# EAGLE board Sunsensors_v1.0_pan (EAGLE 7.1.0)
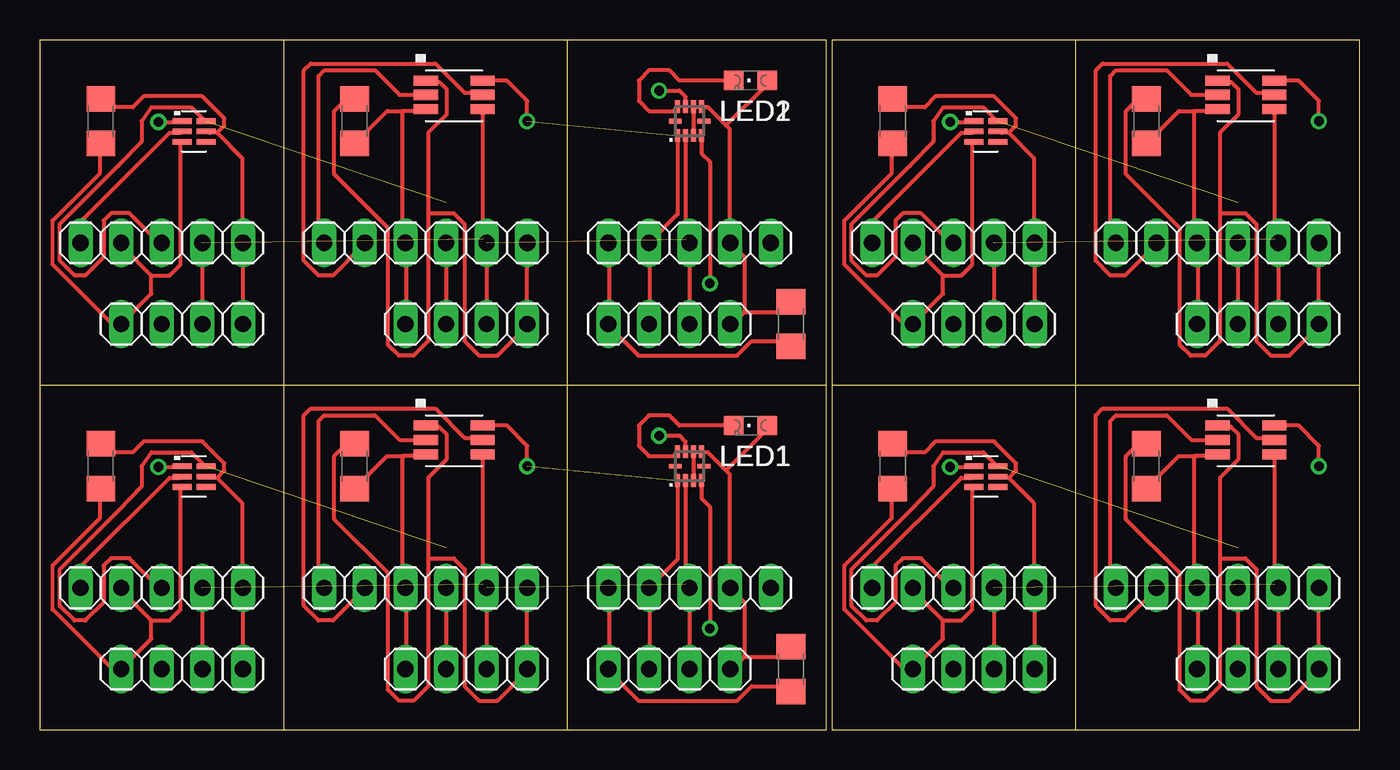
[diagram p0: board, top side]
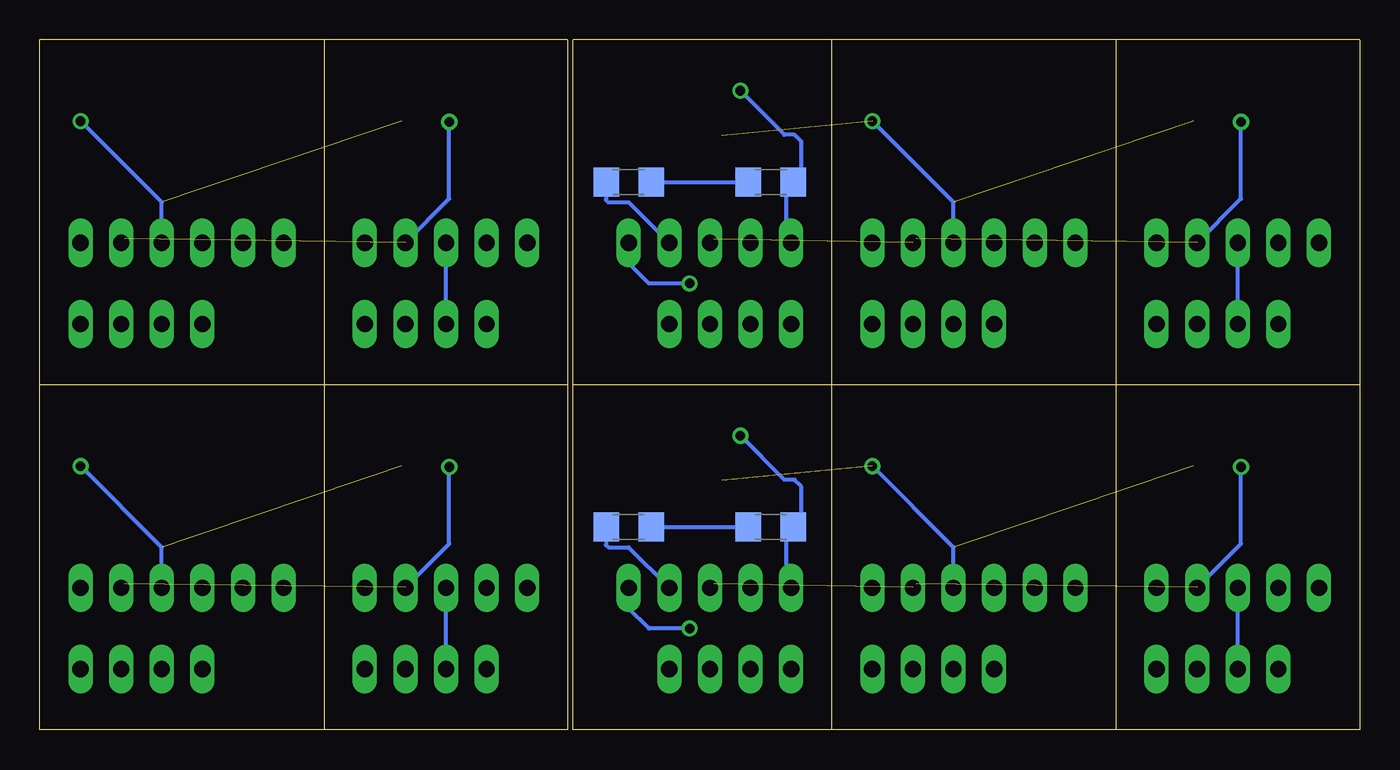
[diagram p1: board, bottom side, seen from below]

Size 82.55 x 43.18 mm. Coordinates in mm from the lower left corner, seen from the top.
Outline: 15.24,0 0,0 0,21.58
Outline: 15.24,0 33.02,0
Outline: 33.02,0 49.2,0 49.2,21.58
Outline: 15.24,21.59 15.24,0
Outline: 33.02,0 33.02,21.59
Outline: 0,21.59 15.24,21.59
Outline: 15.24,21.59 33.02,21.59
Outline: 33.02,21.59 49.2,21.59
Outline: 0,21.59 15.24,21.59
Outline: 15.24,21.59 33.02,21.59
Outline: 33.02,21.59 49.2,21.59
Outline: 49.2,21.59 49.2,43.17
Outline: 0,43.17 0,21.59
Outline: 15.24,43.18 15.24,21.59
Outline: 33.02,21.59 33.02,43.18
Outline: 0,43.18 15.24,43.18
Outline: 15.24,43.18 33.02,43.18
Outline: 33.02,43.18 49.2,43.18
Outline: 64.77,0 49.53,0 49.53,21.58
Outline: 64.77,0 82.55,0 82.55,21.59
Outline: 64.77,21.59 64.77,0
Outline: 49.53,21.59 64.77,21.59
Outline: 64.77,21.59 82.55,21.59
Outline: 49.53,21.59 64.77,21.59
Outline: 64.77,21.59 82.55,21.59
Outline: 49.53,43.17 49.53,21.59
Outline: 64.77,43.18 64.77,21.59
Outline: 82.55,21.59 82.55,43.18 64.77,43.18
Outline: 49.53,43.18 64.77,43.18
Copper layers (1*16): Top 0.035mm / dielectric 1.5mm / Bottom 0.035mm
Design rules "default": minimum track width 10mil, minimum drill 24mil, track to track 8mil, track to pad 8mil, pad to pad 8mil, via to via 8mil, smd to smd 8mil, copper to edge 40mil, drill to drill 8mil, minimum pad ring 10mil, minimum via ring 8mil, stop-mask expansion 4mil, vias tented up to drill 0mil, thermal gap 10mil

## Footprints (pad centres in the part's own frame; a part is rotated, then mirrored left to right if it is on the bottom)
C1206 = smd 1.6 x 1.8: 1 -1.4,0; 2 1.4,0
QFN-10 = smd 0.8 x 0.3: 1 -0.9,0.75; 2 -0.9,0.25; 3 -0.9,-0.25; 4 -0.9,-0.75; 6 0.9,-0.75; 7 0.9,-0.25; 8 0.9,0.25; 9 0.9,0.75 | smd 0.3 x 0.8: 5 0,-0.9; 10 0,0.9
1X04 = drill 1.016 long: 1 -3.81,0; 2 -1.27,0; 3 1.27,0; 4 3.81,0
1X05 = drill 1.016 long: 1 -5.08,0; 2 -2.54,0; 3 0,0; 4 2.54,0; 5 5.08,0
1X06 = drill 1.016 long: 1 -6.35,0; 2 -3.81,0; 3 -1.27,0; 4 1.27,0; 5 3.81,0; 6 6.35,0
CHIPLED_0805 = smd 1.2 x 1.2: A 0,-1.05; C 0,1.05
ODFN6 = smd 1.199 x 0.351: P$1 0,0; P$2 0,-0.65; P$3 0,-1.3; P$4 1.501,-1.3; P$5 1.501,-0.65; P$6 1.501,0
TMB-6 = smd 1.524 x 0.635: P$1 0,0; P$2 0,-0.899; P$3 0,-1.801; P$4 3.556,-1.801; P$5 3.556,-0.899; P$6 3.556,0

## Placement (x,y rotation side)
C1  0.1uF  [C1206]  19.68,16.51 270 top
C2  0.1uF  [C1206]  3.81,16.51 270 top
C3  0.1uF  [C1206]  46.99,3.81 270 top
C4  15uF  [C1206]  36.83,12.7 0 bottom
C5  0.1uF  [C1206]  19.68,38.1 270 top
C6  0.1uF  [C1206]  3.81,38.1 270 top
C7  0.1uF  [C1206]  46.99,25.4 270 top
C8  15uF  [C1206]  36.83,34.29 0 bottom
C9  0.1uF  [C1206]  69.22,16.51 270 top
C10  0.1uF  [C1206]  53.34,16.51 270 top
C11  0.1uF  [C1206]  69.22,38.1 270 top
C12  0.1uF  [C1206]  53.34,38.1 270 top
IC1  SI1145  [QFN-10]  40.64,16.51 90 top
IC2  SI1145  [QFN-10]  40.64,38.1 90 top
JP1  [1X04]  8.89,3.81 180 top
JP2  [1X05]  7.62,8.89 180 top
JP3  [1X04]  26.67,3.81 180 top
JP4  [1X06]  24.13,8.89 180 top
JP5  [1X04]  39.37,3.81 180 top
JP6  [1X05]  40.64,8.89 180 top
JP7  [1X04]  8.89,25.4 180 top
JP8  [1X05]  7.62,30.48 180 top
JP9  [1X04]  26.67,25.4 180 top
JP10  [1X06]  24.13,30.48 180 top
JP11  [1X04]  39.37,25.4 180 top
JP12  [1X05]  40.64,30.48 180 top
JP13  [1X04]  58.42,3.81 180 top
JP14  [1X05]  57.15,8.89 180 top
JP15  [1X04]  76.2,3.81 180 top
JP16  [1X06]  73.66,8.89 180 top
JP17  [1X04]  58.42,25.4 180 top
JP18  [1X05]  57.15,30.48 180 top
JP19  [1X04]  76.2,25.4 180 top
JP20  [1X06]  73.66,30.48 180 top
LED1  [CHIPLED_0805]  44.45,19.05 90 top
LED2  [CHIPLED_0805]  44.45,40.64 90 top
R1  30  [C1206]  45.72,12.7 180 bottom
R2  30  [C1206]  45.72,34.29 180 bottom
U$1  TSL25911FN  [ODFN6]  8.89,38.1 0 top
U$2  TSL2561T  [TMB-6]  24.13,40.64 0 top
U$3  TSL25911FN  [ODFN6]  58.42,16.51 0 top
U$4  TSL2561T  [TMB-6]  73.66,19.05 0 top
U$5  TSL25911FN  [ODFN6]  58.42,38.1 0 top
U$6  TSL2561T  [TMB-6]  73.66,40.64 0 top
U$8  TSL25911FN  [ODFN6]  8.89,16.51 0 top
U$9  TSL2561T  [TMB-6]  24.13,19.05 0 top

## Library data of the parts
C1-C12 R1 R2 = rcl
IC1 IC2 = silabs
JP1-JP20 = pinhead
LED1 LED2 = adafruit
U$1-U$6 U$8 U$9 = lpatiny

## Nets
ADDR1: JP4.6 U$9.P$2
ADDR2: JP10.6 U$2.P$2
ADDR3: JP16.6 U$4.P$2
ADDR4: JP20.6 U$6.P$2
GND: C3.2 C4.2 IC1.8 JP5.4 JP6.5
GND1: C2.2 JP1.4 JP2.4 U$8.P$3
GND2: C1.2 JP3.4 JP4.4 U$9.P$3
GND3: C7.2 C8.2 IC2.8 JP11.4 JP12.5
GND4: C6.2 JP7.4 JP8.4 U$1.P$3
GND5: C5.2 JP9.4 JP10.4 U$2.P$3
GND6: C10.2 JP13.4 JP14.4 U$3.P$3
GND7: C9.2 JP15.4 JP16.4 U$4.P$3
GND8: C12.2 JP17.4 JP18.4 U$5.P$3
GND9: C11.2 JP19.4 JP20.4 U$6.P$3
INT1: JP4.5 U$9.P$5
INT2: JP2.5 U$8.P$2
INT3: IC1.4 JP6.1
INT4: JP10.5 U$2.P$5
INT5: JP8.5 U$1.P$2
INT6: IC2.4 JP12.1
INT7: JP16.5 U$4.P$5
INT8: JP14.5 U$3.P$2
INT9: JP20.5 U$6.P$5
INT10: JP18.5 U$5.P$2
N$1: C4.1 R1.1
N$2: IC2.9 LED2.C
N$3: IC1.9 LED1.C
N$4: C8.1 R2.1
SCL: IC1.2 JP1.2 JP2.2 JP3.2 JP4.2 JP5.2 JP6.3 U$8.P$1 U$9.P$4
SCL1: IC2.2 JP7.2 JP8.2 JP9.2 JP10.2 JP11.2 JP12.3 U$1.P$1 U$2.P$4
SCL2: JP13.2 JP14.2 JP15.2 JP16.2 U$3.P$1 U$4.P$4
SCL3: JP17.2 JP18.2 JP19.2 JP20.2 U$5.P$1 U$6.P$4
SDA: IC1.1 JP1.3 JP2.3 JP3.3 JP4.3 JP5.3 JP6.4 U$8.P$6 U$9.P$6
SDA1: IC2.1 JP7.3 JP8.3 JP9.3 JP10.3 JP11.3 JP12.4 U$1.P$6 U$2.P$6
SDA2: JP13.3 JP14.3 JP15.3 JP16.3 U$3.P$6 U$4.P$6
SDA3: JP17.3 JP18.3 JP19.3 JP20.3 U$5.P$6 U$6.P$6
VCC: C3.1 IC1.3 IC1.6 IC1.7 JP5.1 JP6.2 LED1.A R1.2
VCC1: C2.1 JP1.1 JP2.1 U$8.P$5
VCC2: C1.1 JP3.1 JP4.1 U$9.P$1
VCC3: C7.1 IC2.3 IC2.6 IC2.7 JP11.1 JP12.2 LED2.A R2.2
VCC4: C6.1 JP7.1 JP8.1 U$1.P$5
VCC5: C5.1 JP9.1 JP10.1 U$2.P$1
VCC6: C10.1 JP13.1 JP14.1 U$3.P$5
VCC7: C9.1 JP15.1 JP16.1 U$4.P$1
VCC8: C12.1 JP17.1 JP18.1 U$5.P$5
VCC9: C11.1 JP19.1 JP20.1 U$6.P$1

## Tracks (layer width: path | path; a pad name or v marks a point on that pad's centre or on a via)
ADDR1
  Top 0.254: 24.05,18.29 U$9.P$2 22.49,18.15 20.96,19.68 17.78,19.68 17.42,19.33 17.42,9.14 17.65,8.91 JP4.6
ADDR2
  Top 0.254: 24.05,39.88 U$2.P$2 22.49,39.74 20.96,41.27 17.78,41.27 17.42,40.92 17.42,30.73 17.65,30.5 JP10.6
ADDR3
  Top 0.254: 73.58,18.29 U$4.P$2 72.02,18.15 70.48,19.68 67.31,19.68 66.95,19.33 66.95,9.14 67.18,8.91 JP16.6
ADDR4
  Top 0.254: 73.58,39.88 U$6.P$2 72.02,39.74 70.48,41.27 67.31,41.27 66.95,40.92 66.95,30.73 67.18,30.5 JP20.6
GND  (via drill 0.6)
  Top 0.254: C3.2 46.81,2.74 44.53,2.74 43.61,1.83 37.44,1.83 35.61,3.66 JP5.4 35.61,3.89 35.61,8.69 JP6.5 | v38.73,18.41 40,18.41 40.39,18.03 IC1.8
  Bottom 0.254: JP6.5 35.61,8.91 35.84,9.14 35.84,12.57 C4.2 34.92,13.21 34.92,15.24 35.34,15.66 35.98,15.66 v38.73,18.41
GND1
  Top 0.254: 6.96,6.86 8.1,6.86 8.79,7.54 8.79,15.09 U$8.P$3 | 6.96,6.86 5.13,8.69 JP2.4 | C2.2 3.76,15.54 3.76,13.26 0.79,10.29 0.79,7.54 4.45,3.89 4.9,3.89 JP1.4 5.13,3.89 6.96,5.71 6.96,6.86
GND2
  Top 0.254: 22.68,17.14 22.86,17.14 24.05,17.14 U$9.P$3 | JP3.4 22.91,3.89 22.91,8.69 JP4.4 22.68,8.91 22.68,17.14 | C1.2 21.72,17.14 22.68,17.14
GND3  (via drill 0.6)
  Top 0.254: C7.2 46.81,24.33 44.53,24.33 43.61,23.42 37.44,23.42 35.61,25.25 JP11.4 35.61,25.48 35.61,30.28 JP12.5 | v38.73,40.01 40,40.01 40.39,39.62 IC2.8
  Bottom 0.254: JP12.5 35.61,30.5 35.84,30.73 35.84,34.16 C8.2 34.92,34.8 34.92,36.83 35.34,37.25 35.98,37.25 v38.73,40.01
GND4
  Top 0.254: 6.96,28.45 8.1,28.45 8.79,29.13 8.79,36.68 U$1.P$3 | 6.96,28.45 5.13,30.28 JP8.4 | C6.2 3.76,37.13 3.76,34.85 0.79,31.88 0.79,29.13 4.45,25.48 4.9,25.48 JP7.4 5.13,25.48 6.96,27.3 6.96,28.45
GND5
  Top 0.254: 22.68,38.73 22.86,38.73 24.05,38.73 U$2.P$3 | JP9.4 22.91,25.48 22.91,30.28 JP10.4 22.68,30.5 22.68,38.73 | C5.2 21.72,38.73 22.68,38.73
GND6
  Top 0.254: 56.49,6.86 57.63,6.86 58.32,7.54 58.32,15.09 U$3.P$3 | 56.49,6.86 54.66,8.69 JP14.4 | C10.2 53.29,15.54 53.29,13.26 50.32,10.29 50.32,7.54 53.97,3.89 54.43,3.89 JP13.4 54.66,3.89 56.49,5.71 56.49,6.86
GND7
  Top 0.254: 72.21,17.14 72.39,17.14 73.58,17.14 U$4.P$3 | JP15.4 72.44,3.89 72.44,8.69 JP16.4 72.21,8.91 72.21,17.14 | C9.2 71.25,17.14 72.21,17.14
GND8
  Top 0.254: 56.49,28.45 57.63,28.45 58.32,29.13 58.32,36.68 U$5.P$3 | 56.49,28.45 54.66,30.28 JP18.4 | C12.2 53.29,37.13 53.29,34.85 50.32,31.88 50.32,29.13 53.97,25.48 54.43,25.48 JP17.4 54.66,25.48 56.49,27.3 56.49,28.45
GND9
  Top 0.254: 72.21,38.73 72.39,38.73 73.58,38.73 U$6.P$3 | JP19.4 72.44,25.48 72.44,30.28 JP20.4 72.21,30.5 72.21,38.73 | C11.2 71.25,38.73 72.21,38.73
INT1
  Top 0.254: U$9.P$5 27.48,18.29 26.57,18.29 24.74,20.12 16.94,20.12 16.51,19.68 16.51,7.77 17.42,6.86 18.34,6.86 20.17,8.69 JP4.5
INT2
  Top 0.254: U$8.P$2 8.79,15.77 8.1,15.77 2.62,10.29 2.62,8.91 JP2.5
INT3  (via drill 0.6)
  Top 0.254: IC1.4 41.39,14.49 41.91,13.97 v41.91,6.35
  Bottom 0.254: v41.91,6.35 44.45,6.35 45.72,7.62 JP6.1
INT4
  Top 0.254: U$2.P$5 27.48,39.88 26.57,39.88 24.74,41.71 16.94,41.71 16.51,41.27 16.51,29.36 17.42,28.45 18.34,28.45 20.17,30.28 JP10.5
INT5
  Top 0.254: U$1.P$2 8.79,37.36 8.1,37.36 2.62,31.88 2.62,30.5 JP8.5
INT6  (via drill 0.6)
  Top 0.254: IC2.4 41.39,36.08 41.91,35.56 v41.91,27.94
  Bottom 0.254: v41.91,27.94 44.45,27.94 45.72,29.21 JP12.1
INT7
  Top 0.254: U$4.P$5 77.01,18.29 76.1,18.29 74.27,20.12 66.47,20.12 66.04,19.68 66.04,7.77 66.95,6.86 67.87,6.86 69.7,8.69 JP16.5
INT8
  Top 0.254: U$3.P$2 58.32,15.77 57.63,15.77 52.15,10.29 52.15,8.91 JP14.5
INT9
  Top 0.254: U$6.P$5 77.01,39.88 76.1,39.88 74.27,41.71 66.47,41.71 66.04,41.27 66.04,29.36 66.95,28.45 67.87,28.45 69.7,30.28 JP20.5
INT10
  Top 0.254: U$5.P$2 58.32,37.36 57.63,37.36 52.15,31.88 52.15,30.5 JP18.5
N$1
  Bottom 0.254: R1.1 C4.1
N$2
  Top 0.254: LED2.C 40,40.64 39.37,41.27 38.1,41.27 37.46,40.64 37.46,39.37 38.1,38.73 39.62,38.73 IC2.9
N$3
  Top 0.254: LED1.C 40,19.05 39.37,19.68 38.1,19.68 37.46,19.05 37.46,17.78 38.1,17.14 39.62,17.14 IC1.9
N$4
  Bottom 0.254: R2.1 C8.1
SCL  (via drill 0.61)  (2 unrouted)
  Top 0.254: v7.42,16.46 8.79,16.46 U$8.P$1 | JP2.2 JP1.2 | U$9.P$4 27.71,17.14 27.71,9.14 27.94,8.91 JP4.2 JP3.2 | JP5.2 JP6.3 40.39,9.14 IC1.2
  Bottom 0.254: v7.42,16.46 7.42,11.66 10.16,8.91 JP2.2 | 40.64,3.89 JP5.2 | 10.16,3.89 JP1.2 | 27.94,3.89 JP3.2
SCL1  (via drill 0.61)  (2 unrouted)
  Top 0.254: v7.42,38.05 8.79,38.05 U$1.P$1 | JP8.2 JP7.2 | U$2.P$4 27.71,38.73 27.71,30.73 27.94,30.5 JP10.2 JP9.2 | JP11.2 JP12.3 40.39,30.73 IC2.2
  Bottom 0.254: v7.42,38.05 7.42,33.25 10.16,30.5 JP8.2 | 40.64,25.48 JP11.2 | 10.16,25.48 JP7.2 | 27.94,25.48 JP9.2
SCL2  (via drill 0.61)  (1 unrouted)
  Top 0.254: v56.95,16.46 58.32,16.46 U$3.P$1 | JP14.2 JP13.2 | U$4.P$4 77.24,17.14 77.24,9.14 77.47,8.91 JP16.2 JP15.2
  Bottom 0.254: v56.95,16.46 56.95,11.66 59.69,8.91 JP14.2 | 59.69,3.89 JP13.2 | 77.47,3.89 JP15.2
SCL3  (via drill 0.61)  (1 unrouted)
  Top 0.254: v56.95,38.05 58.32,38.05 U$5.P$1 | JP18.2 JP17.2 | U$6.P$4 77.24,38.73 77.24,30.73 77.47,30.5 JP20.2 JP19.2
  Bottom 0.254: v56.95,38.05 56.95,33.25 59.69,30.5 JP18.2 | 59.69,25.48 JP17.2 | 77.47,25.48 JP19.2
SDA  (via drill 0.6)  (2 unrouted)
  Top 0.254: U$8.P$6 10.39,16.46 9.47,17.37 6.96,17.37 6.35,16.51 6.35,15.24 4.9,13.72 1.25,10.06 1.25,7.77 2.16,6.86 2.85,6.86 3.99,8 3.99,10.29 4.45,10.74 5.59,10.74 7.42,8.91 JP2.3 | JP4.3 25.43,8.69 25.43,3.89 JP3.3 | 37.9,3.66 JP5.3 38.12,3.89 38.12,8.69 JP6.4 39.89,10.68 IC1.1 | v30.48,16.51 30.48,17.78 29.21,19.05 U$9.P$6
  Bottom 0.254: JP1.3 7.64,3.89 7.64,8.69 JP2.3 | JP4.3 25.4,11.43 v30.48,16.51
SDA1  (via drill 0.6)  (2 unrouted)
  Top 0.254: U$1.P$6 10.39,38.05 9.47,38.96 6.96,38.96 6.35,38.1 6.35,36.83 4.9,35.31 1.25,31.65 1.25,29.36 2.16,28.45 2.85,28.45 3.99,29.59 3.99,31.88 4.45,32.33 5.59,32.33 7.42,30.5 JP8.3 | JP10.3 25.43,30.28 25.43,25.48 JP9.3 | 37.9,25.25 JP11.3 38.12,25.48 38.12,30.28 JP12.4 39.89,32.27 IC2.1 | v30.48,38.1 30.48,39.37 29.21,40.64 U$2.P$6
  Bottom 0.254: JP7.3 7.64,25.48 7.64,30.28 JP8.3 | JP10.3 25.4,33.02 v30.48,38.1
SDA2  (via drill 0.6)  (1 unrouted)
  Top 0.254: U$3.P$6 59.92,16.46 59,17.37 56.49,17.37 55.88,16.51 55.88,15.24 54.43,13.72 50.77,10.06 50.77,7.77 51.69,6.86 52.38,6.86 53.52,8 53.52,10.29 53.97,10.74 55.12,10.74 56.95,8.91 JP14.3 | JP16.3 74.95,8.69 74.95,3.89 JP15.3 | v80.01,16.51 80.01,17.78 78.74,19.05 U$4.P$6
  Bottom 0.254: JP13.3 57.17,3.89 57.17,8.69 JP14.3 | JP16.3 74.93,11.43 v80.01,16.51
SDA3  (via drill 0.6)  (1 unrouted)
  Top 0.254: U$5.P$6 59.92,38.05 59,38.96 56.49,38.96 55.88,38.1 55.88,36.83 54.43,35.31 50.77,31.65 50.77,29.36 51.69,28.45 52.38,28.45 53.52,29.59 53.52,31.88 53.97,32.33 55.12,32.33 56.95,30.5 JP18.3 | JP20.3 74.95,30.28 74.95,25.48 JP19.3 | v80.01,38.1 80.01,39.37 78.74,40.64 U$6.P$6
  Bottom 0.254: JP17.3 57.17,25.48 57.17,30.28 JP18.3 | JP20.3 74.93,33.02 v80.01,38.1
VCC
  Top 0.254: 44.07,4.57 46.81,4.57 C3.1 | 44.07,4.57 43.38,3.89 JP5.1 | 42.91,16.24 43.15,16 43.15,8.91 JP6.2 44.07,8 44.07,4.57 | 42.91,16.24 41.78,17.37 41.33,17.37 IC1.6 IC1.7 IC1.3 | LED1.A 45.5,18.83 42.91,16.24
  Bottom 0.254: R1.2 47.14,11.58 46.99,11.43 45.72,11.43 JP6.2
VCC1
  Top 0.254: 11.07,15.77 10.62,15.77 U$8.P$5 | 11.07,15.77 12.68,14.17 12.68,8.91 JP2.1 12.68,8.69 12.68,3.89 JP1.1 | 11.07,15.77 11.53,16.23 11.53,16.69 10.16,18.06 6.5,18.06 5.82,17.37 3.99,17.37 C2.1
VCC2
  Top 0.254: JP4.1 30.46,8.69 30.46,3.89 JP3.1 30.46,3.66 28.63,1.83 27.48,1.83 26.57,2.74 26.57,10.06 25.88,10.74 24.28,10.74 | 24.28,10.74 24.28,15.77 25.43,16.92 25.43,18.52 24.97,18.97 24.28,18.97 U$9.P$1 | 24.28,10.74 24.28,2.74 23.37,1.83 22.45,1.83 21.77,2.52 21.77,9.83 18.41,13.18 18.41,17.14 19.18,17.91 C1.1
VCC3
  Top 0.254: 44.07,26.16 46.81,26.16 C7.1 | 44.07,26.16 43.38,25.48 JP11.1 | 42.91,37.83 43.15,37.59 43.15,30.5 JP12.2 44.07,29.59 44.07,26.16 | 42.91,37.83 41.78,38.96 41.33,38.96 IC2.6 IC2.7 IC2.3 | LED2.A 45.5,40.42 42.91,37.83
  Bottom 0.254: R2.2 47.14,33.17 46.99,33.02 45.72,33.02 JP12.2
VCC4
  Top 0.254: 11.07,37.36 10.62,37.36 U$1.P$5 | 11.07,37.36 12.68,35.76 12.68,30.5 JP8.1 12.68,30.28 12.68,25.48 JP7.1 | 11.07,37.36 11.53,37.82 11.53,38.28 10.16,39.65 6.5,39.65 5.82,38.96 3.99,38.96 C6.1
VCC5
  Top 0.254: JP10.1 30.46,30.28 30.46,25.48 JP9.1 30.46,25.25 28.63,23.42 27.48,23.42 26.57,24.33 26.57,31.65 25.88,32.33 24.28,32.33 | 24.28,32.33 24.28,37.36 25.43,38.51 25.43,40.11 24.97,40.56 24.28,40.56 U$2.P$1 | 24.28,32.33 24.28,24.33 23.37,23.42 22.45,23.42 21.77,24.11 21.77,31.42 18.41,34.77 18.41,38.73 19.18,39.5 C5.1
VCC6
  Top 0.254: 60.6,15.77 60.15,15.77 U$3.P$5 | 60.6,15.77 62.2,14.17 62.2,8.91 JP14.1 62.2,8.69 62.2,3.89 JP13.1 | 60.6,15.77 61.06,16.23 61.06,16.69 59.69,18.06 56.03,18.06 55.35,17.37 53.52,17.37 C10.1
VCC7
  Top 0.254: JP16.1 79.98,8.69 79.98,3.89 JP15.1 79.98,3.66 78.16,1.83 77.01,1.83 76.1,2.74 76.1,10.06 75.41,10.74 73.81,10.74 | 73.81,10.74 73.81,15.77 74.95,16.92 74.95,18.52 74.5,18.97 73.81,18.97 U$4.P$1 | 73.81,10.74 73.81,2.74 72.9,1.83 71.98,1.83 71.3,2.52 71.3,9.83 67.95,13.18 67.95,17.14 68.71,17.91 C9.1
VCC8
  Top 0.254: 60.6,37.36 60.15,37.36 U$5.P$5 | 60.6,37.36 62.2,35.76 62.2,30.5 JP18.1 62.2,30.28 62.2,25.48 JP17.1 | 60.6,37.36 61.06,37.82 61.06,38.28 59.69,39.65 56.03,39.65 55.35,38.96 53.52,38.96 C12.1
VCC9
  Top 0.254: JP20.1 79.98,30.28 79.98,25.48 JP19.1 79.98,25.25 78.16,23.42 77.01,23.42 76.1,24.33 76.1,31.65 75.41,32.33 73.81,32.33 | 73.81,32.33 73.81,37.36 74.95,38.51 74.95,40.11 74.5,40.56 73.81,40.56 U$6.P$1 | 73.81,32.33 73.81,24.33 72.9,23.42 71.98,23.42 71.3,24.11 71.3,31.42 67.95,34.77 67.95,38.73 68.71,39.5 C11.1

## Text on the board
tValues: INT | GND | SDA | SCL | VCC | ADDR | INT | GND | SDA | SCL | VCC | GND | SDA | SCL | VCC | INT | INT | GND | SDA | SCL | VCC | ADDR | INT | GND | SDA | SCL | VCC | INT | GND | SDA | SCL | VCC | ADDR | INT | GND | SDA | SCL | VCC | GND | SDA | SCL | VCC | INT | INT | GND | SDA | SCL | VCC | ADDR | INT | GND | SDA | SCL | VCC
_tNames: LED1 | LED1 | LED1 | LED1 | LED2 | LED1 | LED1 | LED1 | LED1 | LED1